# Altium PCB Four-Axis.PcbDoc
Units mm, origin at the board's own origin, x right, y up, seen from the top; angles counter-clockwise.
Board outline 49.58 x 49.58 mm, 2 copper layers (Top Layer, Bottom Layer); 70 components, 88 nets, 301 pads, 48 vias.
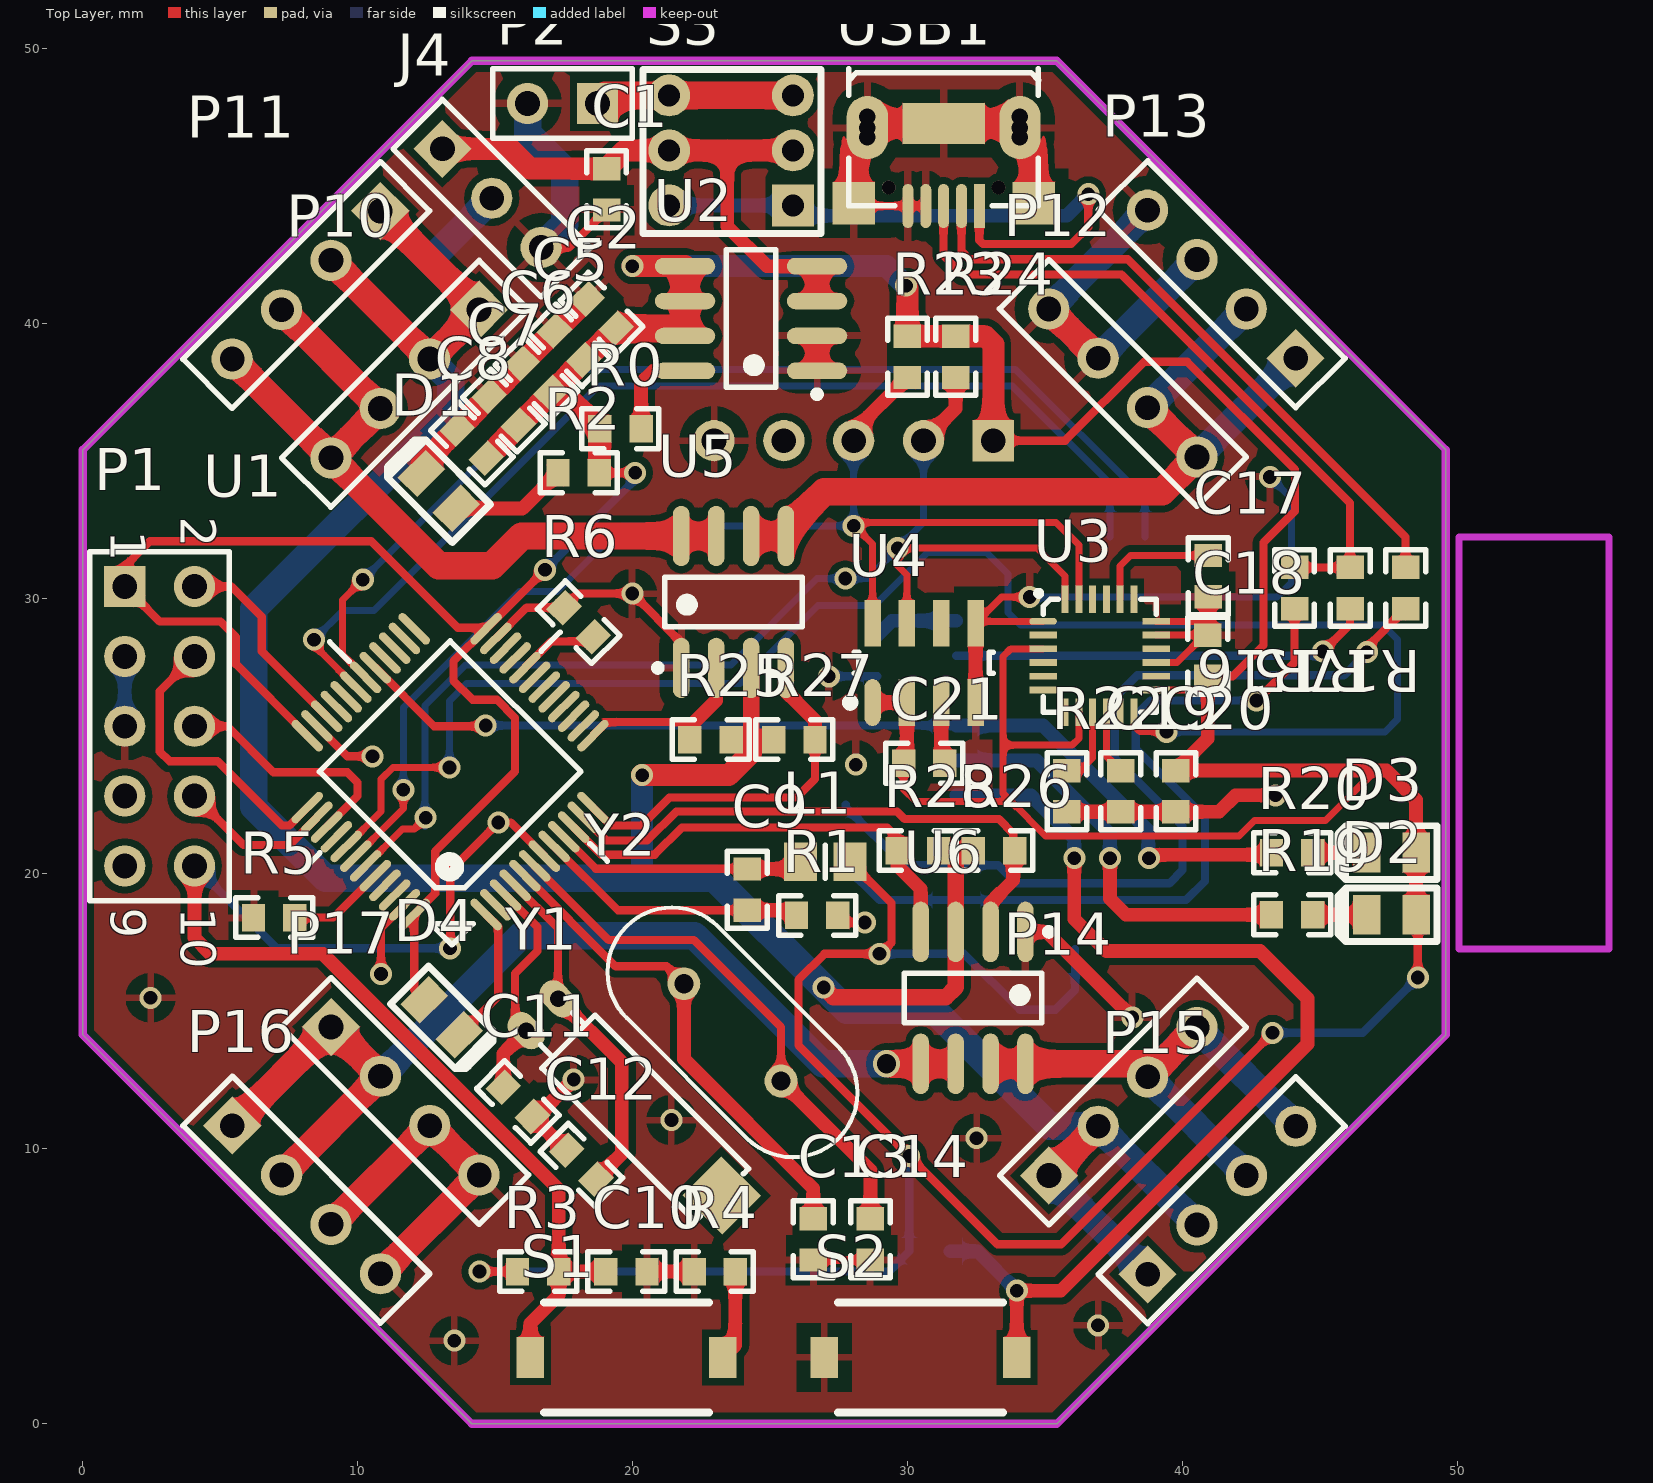
[diagram p0: Top Layer view]
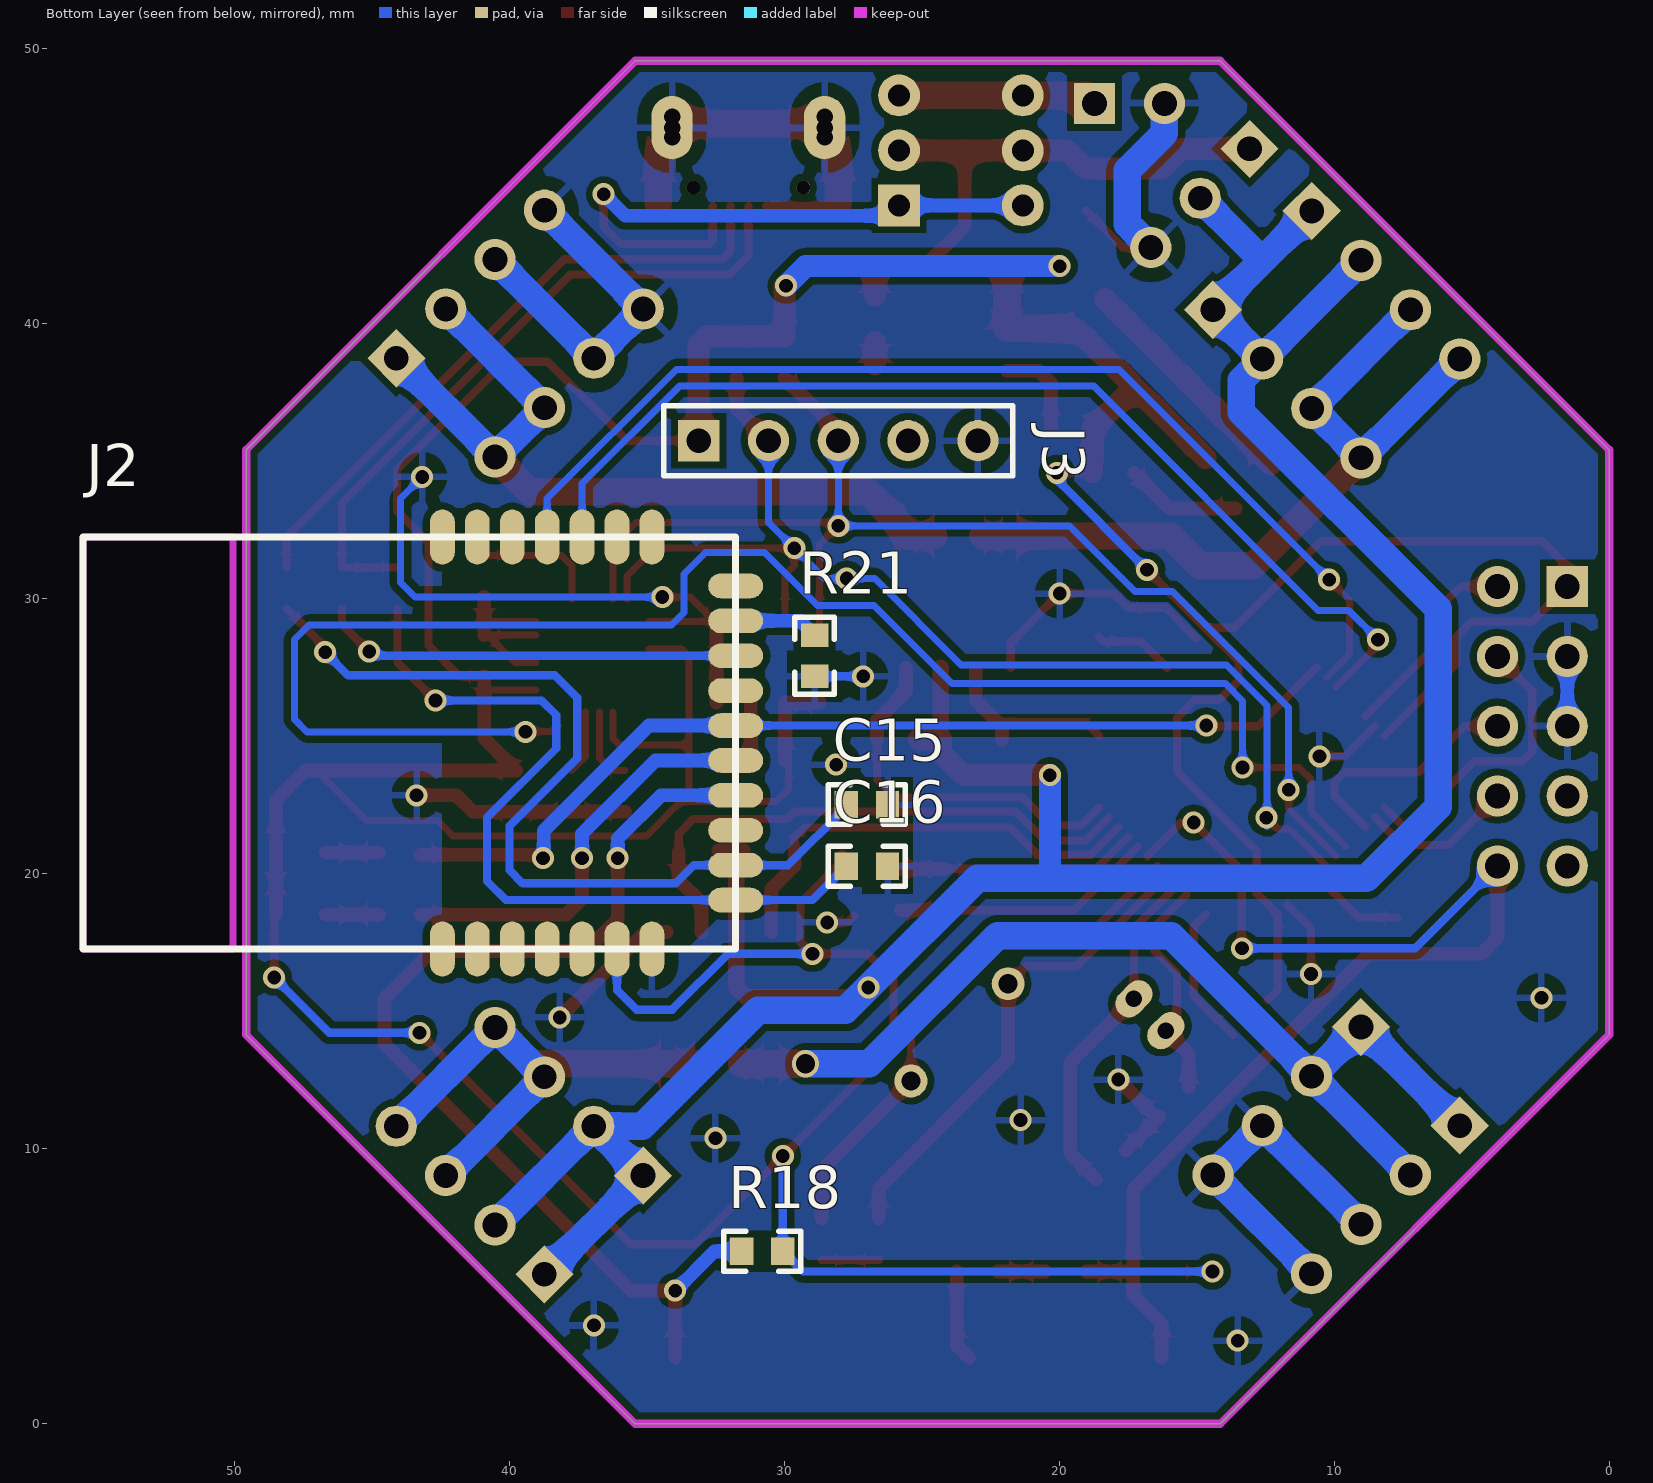
[diagram p1: Bottom Layer view, seen from below]
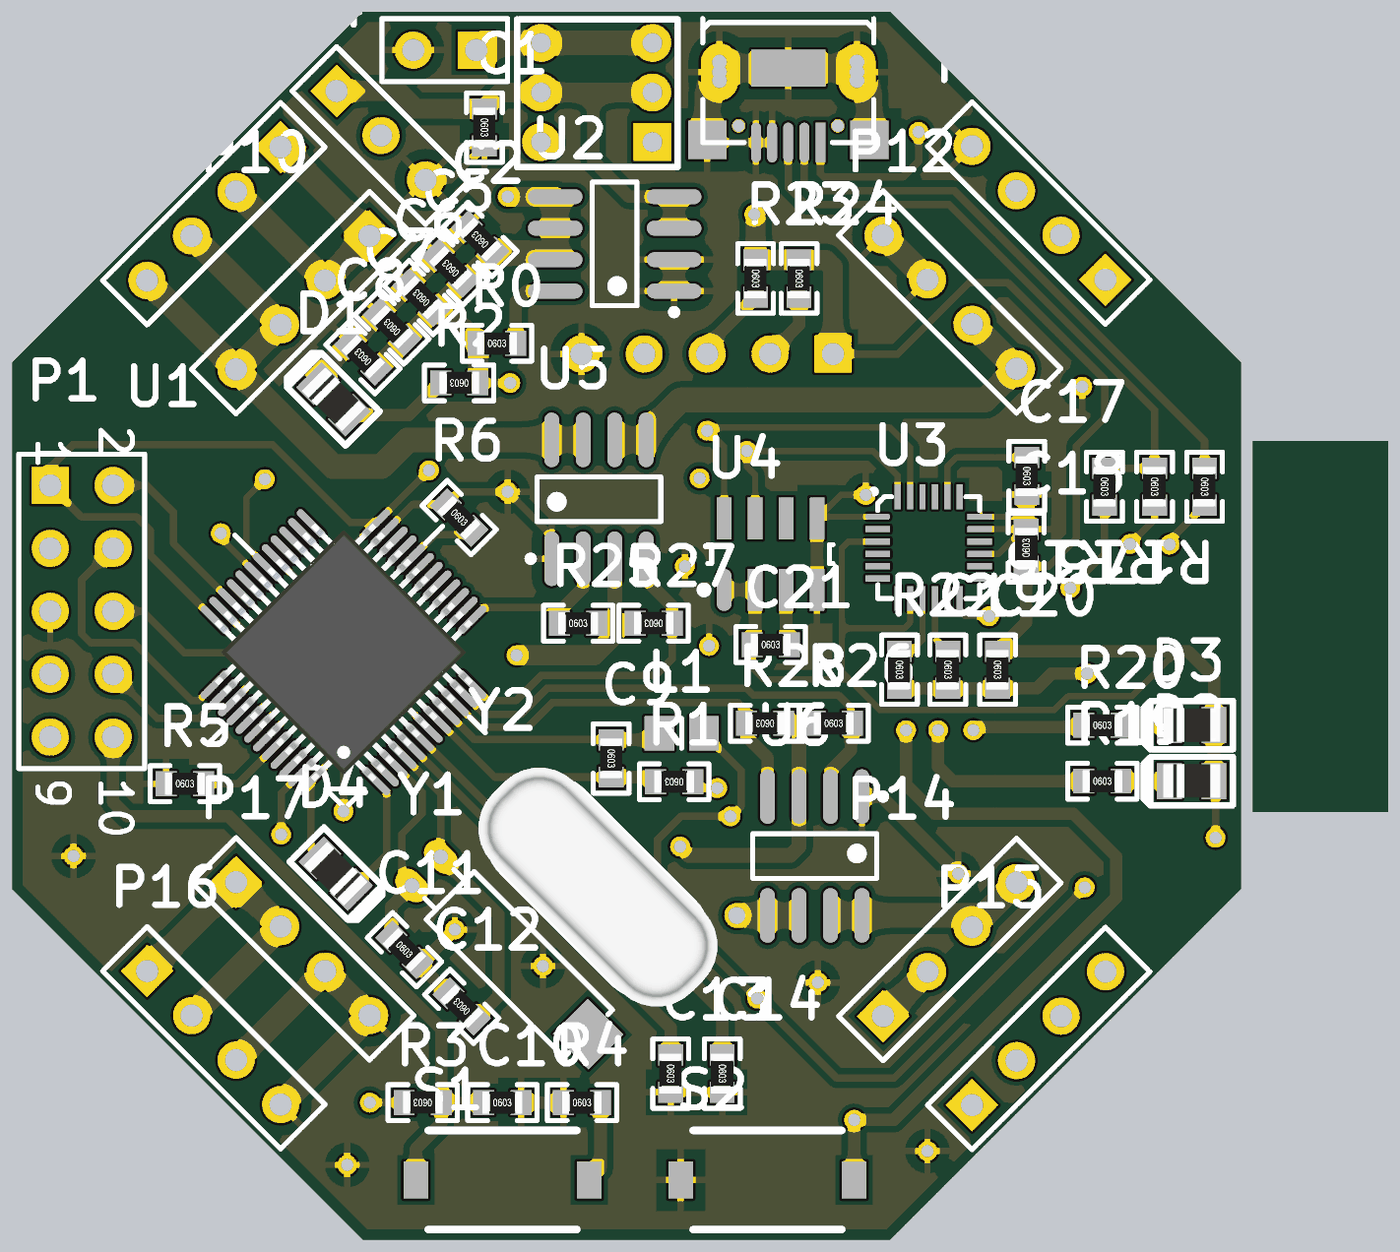
[diagram p2: 3D render of the assembled board from above, using the file's embedded part models]
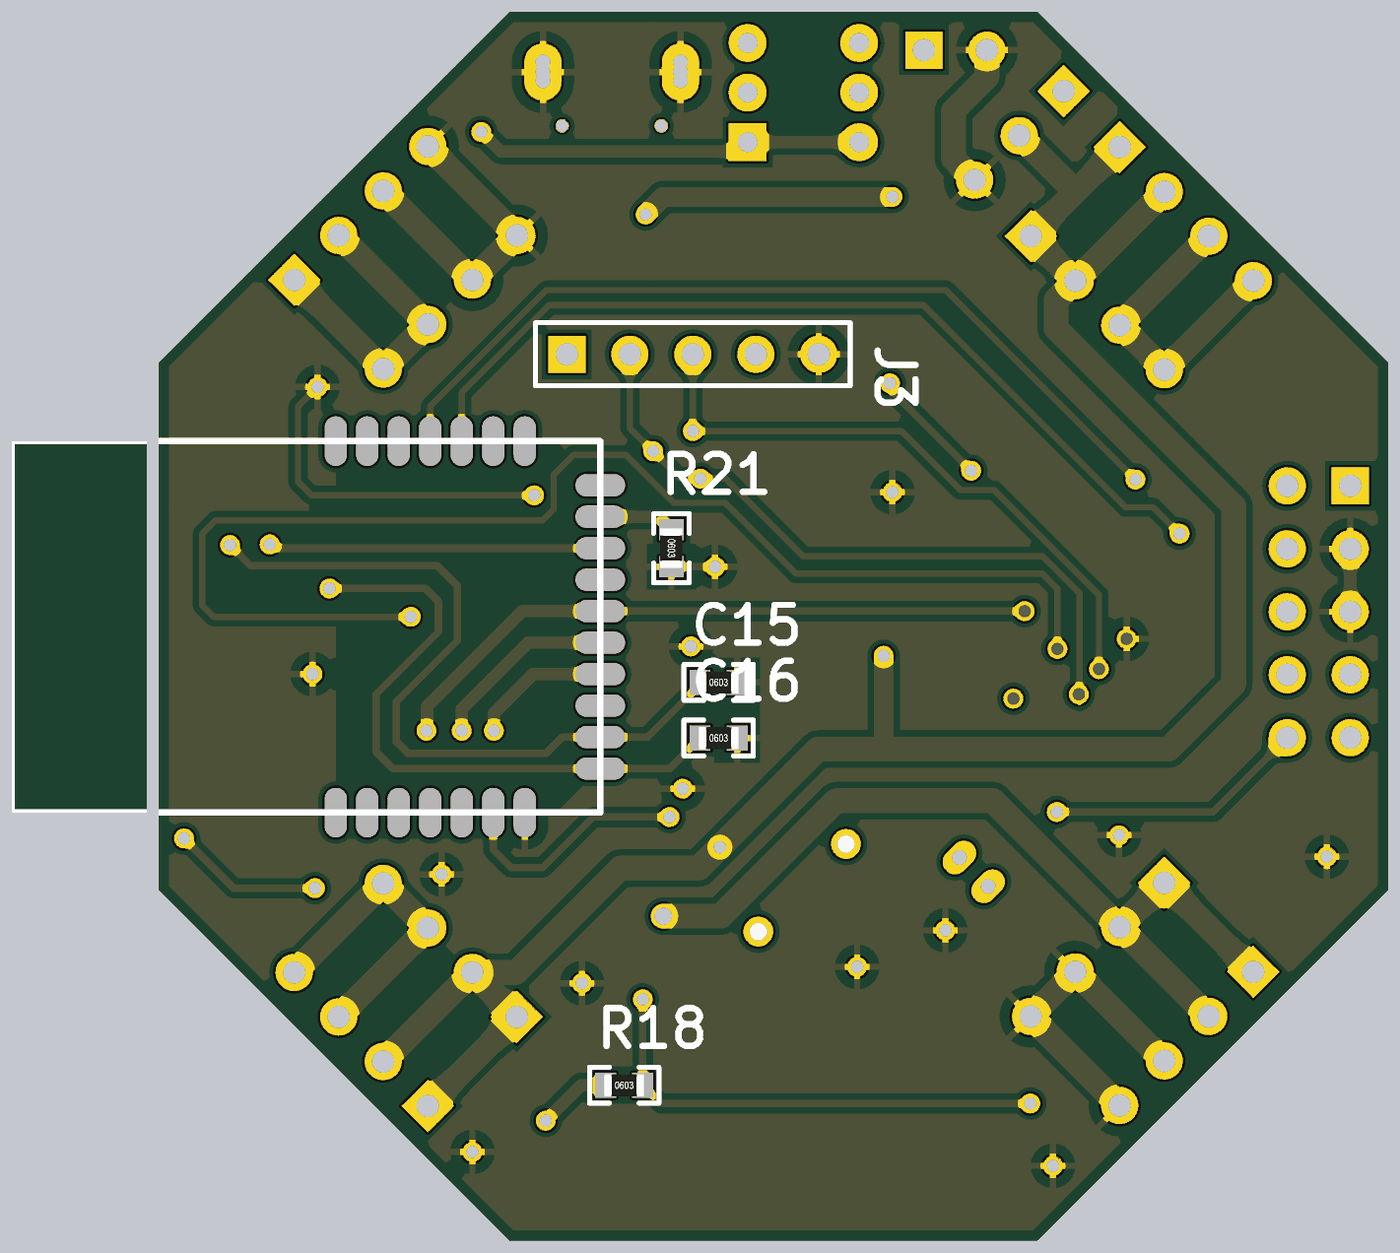
[diagram p3: 3D render of the assembled board from below, using the file's embedded part models]

## Layer stack, top to bottom
Top Solder: solder mask 0.0102, Solder Resist, Dk 3.5
Top Layer: signal copper 0.0356
Dielectric 1: dielectric 0.32, FR-4, Dk 4.8
Bottom Layer: signal copper 0.0356
Bottom Solder: solder mask 0.0102, Solder Resist, Dk 3.5

## Board outline
0,14.122 14.148,-0.025 35.433,-0.025 49.581,14.122 49.581,35.408 35.433,49.555 14.148,49.555 0,35.408

## Design rules (kind name [scope] priority, off if disabled: settings)
Clearance [All] p1: gap=0.254
PolygonConnect [All] p1: connectstyle=Relief reliefconductorwidth=0.254 reliefentries=4 polygonreliefangle="90 Angle" airgapwidth=0.5
RoutingVias [All] p1: holewidth=0.5 width=0.8 viastyle="Through Hole" minholewidth=0.3 minwidth=0.6 maxholewidth=0.711 maxwidth=1.27
SolderMaskExpansion [All] p1: expansion=0.102
UnpouredPolygon [All] p1: allowunpoured=FALSE
Width POWER [InNet('GND','VCC','VIN','3.3V','MO0+','MO0-','MO1+','MO1-','MO2+','MO2-','MO3+','MO3-','MO4+','MO4-')] p1: maxlimit=1.5 minlimit=0.254 preferedwidth=1
Width [All] p2: maxlimit=0.5 minlimit=0.254 preferedwidth=0.254
29 further rules are at their usual default settings.

## Components (designator, comment, footprint, x,y, rotation, side; value= is the part's Value field where it differs from the comment)
C1 "Cap Pol3" 0603R 19.05,44.882 r270 top
C2 "Cap Pol3" 0603R 18.872,40.361 r135 top
C5 "Cap Pol3" 0603R 17.688,39.203 r135 top
C6 "Cap Pol3" 0603R 16.502,38.017 r135 top
C7 "Cap Pol3" 0603R 15.317,36.832 r135 top
C8 "Cap Pol3" 0603R 14.149,35.63 r135 top
C9 "Cap Pol3" 0603R 24.166,19.406 r270 top
C10 "Cap Pol3" 0603R 19.774,5.512 r0 top
C11 "Cap Pol3" 0603R 15.824,11.684 r315 top
C12 "Cap Pol3" 0603R 18.136,9.398 r135 top
C13 "Cap Pol3" 0603R 26.568,6.68 r270 top
C14 "Cap Pol3" 0603R 28.651,6.68 r270 top
C15 "Cap Pol3" 0603R 27,22.502 r180 bottom
C16 "Cap Pol3" 0603R 27,20.256 r180 bottom
C17 "Cap Pol3" 0603R 40.945,30.81 r270 top
C18 "Cap Pol3" 0603R 40.919,27.915 r90 top
C19 "Cap Pol3" 0603R 37.757,22.987 r270 top
C20 "Cap Pol3" 0603R 39.764,22.987 r270 top
C21 "Cap Pol3" 0603R 30.607,24.003 r0 top
D1 "Power" 0805D 12.954,33.909 r135 top
D2 "PAIR" 0805D 47.6,18.491 r180 top
D3 "LINK" 0805D 47.6,20.752 r180 top
D4 "1N4148" 0805D 13.056,14.757 r315 top
J2 "BleMicro" BleMicro 44.602,24.74 r90 bottom locked
J3 "SRF02" HDR1X5 33.122,35.738 r180 bottom
J4 "Header 3" HDR1X3 13.081,46.355 r315 top locked
L1 "Inductor" 6-0805_N 27.011,20.422 r180 top
P1 "JTAG" HDR2X5 1.524,30.429 r270 top
P2 "电源输入" HDR1X2 18.72,48.006 r180 top locked
P10 "Header 4" HDR1X4#1 14.413,40.502 r225 top locked
P11 "Header 4" HDR1X4#1 10.82,44.094 r225 top locked
P12 "Header 4" HDR1X4#2 40.528,35.143 r135 top locked
P13 "Header 4" HDR1X4#1 44.12,38.735 r135 top locked
P14 "Header 4" HDR1X4#1 35.143,9.002 r45 top locked
P15 "Header 4" HDR1X4#1 38.735,5.41 r45 top locked
P16 "Header 4" HDR1X4#1 5.436,10.82 r315 top locked
P17 "Header 4" HDR1X4#1 9.028,14.413 r315 top locked
R0 "Res2" 0603R 19.558,36.17 r0 top
R1 "Res2" 0603R 26.711,18.466 r180 top
R2 "Res2" 0603R 18.034,34.569 r180 top
R3 "Res2" 0603R 16.561,5.512 r180 top
R4 "Res2" 0603R 22.987,5.512 r0 top
R5 "Res2" 0603R 6.96,18.39 r0 top
R6 "Res2" 0603R 18.034,29.134 r315 top
R15 "Res2" 0603R 46.101,30.378 r270 top
R16 "Res2" 0603R 44.082,30.378 r270 top
R17 "Res2" 0603R 48.12,30.378 r270 top
R18 "Res2" 0603R 30.81,6.248 r180 bottom
R19 "Res2" 0603R 43.993,18.491 r0 top
R20 "Res2" 0603R 43.993,20.752 r0 top
R21 "Res2" 0603R 28.905,27.915 r270 bottom
R22 "Res2" 0603R 35.801,22.987 r270 top
R23 "Res2" 0603R 29.997,38.786 r270 top
R24 "Res2" 0603R 31.75,38.786 r270 top
R25 "Res2" 0603R 22.835,24.867 r0 top
R26 "Res2" 0603R 33.147,20.828 r0 top
R27 "Res2" 0603R 25.883,24.867 r180 top
R28 "Res2" 0603R 30.378,20.828 r180 top
S1 "RST" SW-SOT3*6 16.281,2.388 r270 top
S2 "BOOT" SW-SOT3*6 33.975,2.388 r90 top
S3 "电源开关" 自锁开关-5.8*5.8 25.832,44.296 r180 top locked
U1 "STM32F103CBT6" LQFP48 13.36,23.698 r135 top
U2 "TPS7333-8" TPS73XX-8 24.308,40.183 r180 top
U3 "MPU9150" LCC24 36.932,27.898 r0 top
U4 "MS5611" LCC8 28.727,26.213 r90 top
U5 "SP8M4" TPS73XX-8 23.673,29.87 r90 top
U6 "SP8M4" TPS73XX-8 32.385,15.469 r270 top
USB1 "MicroUSB" MICROUSB_D2S6 31.471,46.308 r0 top locked
Y1 "32.768K" OSC_3X8d 16.129,14.275 r315 top
Y2 "8M" XTAL-HC49S 21.864,15.982 r315 top

## Footprints (in the part's own frame and the unit in brackets; to place one, negate y for a bottom-side part, rotate by r counter-clockwise, add the part's x,y. Pads: shape width x height; smd on the part's side, far side on the other; paste and mask are expansions set on the pad)
6-0805_N [mm] "Chip Resistor, Body 2.0x1.2mm, IPC Medium Density"
  rect 1.2x1.4 smd: 1(-0.9,0) 2(0.9,0)
  silkscreen extent 0,-0.6 0,0.6, body extent -1.07,-0.7 1.08,0.7, height 0.7
0603R [mm]
  rect 0.85x1 smd: 1(-0.75,0) 2(0.75,0)
  Top Layer pour cut-out: -0.33,0.495 -0.33,-0.495 0.33,-0.495 0.33,0.495
  silkscreen extent -1.4,-0.72 1.4,0.72, body extent -0.8,-0.46 0.8,0.44, height 0.5
0805D [mm]
  rect 1x1.45 smd: 1(-0.9,0) 2(0.9,0)
  Top Layer pour cut-out: -0.432,0.749 -0.432,-0.737 0.406,-0.737 0.406,0.749
  silkscreen extent -1.66,-0.98 1.94,0.98, body extent -1.16,-0.68 1.14,0.67, height 0.76
BleMicro [mm]
  oval 2x0.9 smd: 1(-7.493,-2.159) 2(-7.493,-3.429) 3(-7.493,-4.699) 4(-7.493,-5.969) 5(-7.493,-7.239) 6(-7.493,-8.509) 7(-7.493,-9.779) 18(7.493,-9.779) 19(7.493,-8.509) 20(7.493,-7.239) 21(7.493,-5.969) 22(7.493,-4.699) 23(7.493,-3.429) 24(7.493,-2.159)
  oval 0.9x2 smd: 8(-5.715,-12.827) 9(-4.445,-12.827) 10(-3.175,-12.827) 11(-1.905,-12.827) 12(-0.635,-12.827) 13(0.635,-12.827) 14(1.905,-12.827) 15(3.175,-12.827) 16(4.445,-12.827) 17(5.715,-12.827)
  Keep-Out Layer board cut-out: -7.493,10.922 -7.493,5.461 7.493,5.461 7.493,10.922
  Keep-Out Layer lines w0.254: -7.493,5.461 7.493,5.461 7.493,10.922 -7.493,10.922 -7.493,5.461
  silkscreen extent -7.49,-12.83 7.49,10.92
HDR1X2 [mm] "Connector; Header; 2 Position"
  rect 1.5x1.5 hole 0.9: 1(0,0)
  round 1.5 hole 0.9: 2(2.54,0)
  silkscreen extent -1.27,-1.27 3.81,1.27
HDR1X3 [mm] "Connector; Header; 3 Position"
  rect 1.5x1.5 hole 0.9: 1(0,0)
  round 1.5 hole 0.9: 2(2.54,0) 3(5.08,0)
  silkscreen extent -1.27,-1.27 6.35,1.27
HDR1X4#1 [mm] "Connector; Header; 4 Position"
  rect 1.5x1.5 hole 0.9: 1(0,0)
  round 1.5 hole 0.9: 2(2.54,0) 3(5.08,0) 4(7.62,0)
  silkscreen extent -1.27,-1.27 8.89,1.27
HDR1X4#2 [mm] "Connector; Header; 4 Position"
  round 1.5 hole 0.9: 1(0,0) 2(2.54,0) 3(5.08,0) 4(7.62,0)
  silkscreen extent -1.27,-1.27 8.89,1.27
HDR1X5 [mm] "Connector; Header; 5 Position"
  rect 1.5x1.5 hole 0.9: 1(0,0)
  round 1.5 hole 0.9: 2(2.54,0) 3(5.08,0) 4(7.62,0) 5(10.16,0)
  silkscreen extent -1.27,-1.27 11.43,1.27
HDR2X5 [mm] "Connector; Header; 5x2 Position"
  rect 1.5x1.5 hole 0.9: 1(0,0)
  round 1.5 hole 0.9: 2(0,2.54) 3(2.54,0) 4(2.54,2.54) 5(5.08,0) 6(5.08,2.54) 7(7.62,0) 8(7.62,2.54) 9(10.16,0) 10(10.16,2.54)
  silkscreen extent -1.27,-1.27 11.43,3.81
LCC8 [mm]
  oval 1.7x0.6 smd: 1(0,0)
  rect 1.7x0.6 smd: 2(0,-1.25) 3(0,-2.5) 4(0,-3.75) 5(2.886,-3.75) 6(2.886,-2.5) 7(2.886,-1.25) 8(2.886,0)
  Top Layer pour cut-out: 0,0.381 0,-4.064 2.921,-4.064 2.921,0.381
  silkscreen extent -0.15,-4.39 1.83,0.96
LCC24 [mm]
  oval 1x0.25 smd: 1(-2.001,1.27)
  rect 1x0.25 smd: 2(-2.001,0.77) 3(-2.001,0.27) 4(-2.001,-0.23) 5(-2.001,-0.73) 6(-2.001,-1.23) 13(2.109,-1.23) 14(2.109,-0.73) 15(2.109,-0.23) 16(2.109,0.27) 17(2.109,0.77) 18(2.109,1.27)
  rect 0.25x1 smd: 7(-1.196,-2.035) 8(-0.696,-2.035) 9(-0.196,-2.035) 10(0.304,-2.035) 11(0.804,-2.035) 12(1.304,-2.035) 19(1.304,2.075) 20(0.804,2.075) 21(0.304,2.075) 22(-0.196,2.075) 23(-0.696,2.075) 24(-1.196,2.075)
  Top Layer pour cut-out: -1.446,2.075 -2.001,1.52 -2.001,-1.48 -1.446,-2.035 -1.446,-2.035 1.554,-2.035 2.109,-1.48 2.109,1.52 1.554,2.075
  silkscreen extent -2.26,-2.03 2.11,2.39
LQFP48 [mm]
  oval 1.5x0.3 smd: 1(-4.6,2.75) 2(-4.6,2.25) 3(-4.6,1.75) 4(-4.6,1.25) 5(-4.6,0.75) 6(-4.6,0.25) 7(-4.6,-0.25) 8(-4.6,-0.75) 9(-4.6,-1.25) 10(-4.6,-1.75) 11(-4.6,-2.25) 12(-4.6,-2.75) 25(4.6,-2.75) 26(4.6,-2.25) 27(4.6,-1.75) 28(4.6,-1.25) 29(4.6,-0.75) 30(4.6,-0.25) 31(4.6,0.25) 32(4.6,0.75) 33(4.6,1.25) 34(4.6,1.75) 35(4.6,2.25) 36(4.6,2.75)
  oval 0.3x1.5 smd: 13(-2.75,-4.6) 14(-2.25,-4.6) 15(-1.75,-4.6) 16(-1.25,-4.6) 17(-0.75,-4.6) 18(-0.25,-4.6) 19(0.25,-4.6) 20(0.75,-4.6) 21(1.25,-4.6) 22(1.75,-4.6) 23(2.25,-4.6) 24(2.75,-4.6) 37(2.75,4.6) 38(2.25,4.6) 39(1.75,4.6) 40(1.25,4.6) 41(0.75,4.6) 42(0.25,4.6) 43(-0.25,4.6) 44(-0.75,4.6) 45(-1.25,4.6) 46(-1.75,4.6) 47(-2.25,4.6) 48(-2.75,4.6)
  silkscreen extent -6.35,-6.42 6.44,6.42, body extent -4.53,-4.51 4.5,4.51, height 1.75
MICROUSB_D2S6 [mm]
  round 0.5 hole 0.5: 0(-2.157,-1.357) 0(1.843,-1.357)
  rect 0.4x1.6 smd: 1(1.143,-2.032)
  oval 0.4x1.6 smd: 2(0.493,-2.032) 3(-0.157,-2.032) 4(-0.807,-2.032) 5(-1.457,-2.032)
  rect 1.55x1.55 smd: 6(-3.429,-1.929) 6(3.124,-1.929)
  round 0.8 hole 0.6: 6(-2.932,0.468) 6(-2.932,1.218) 6(2.618,0.468) 6(2.618,1.218)
  oval 1.5x2.3 hole 0.6: 6(-2.932,0.818) 6(2.618,0.818)
  rect 3x1.5 smd: 6(-0.157,0.968)
  silkscreen extent -3.61,-2.03 3.29,2.97
OSC_3X8d [mm]
  oval 1.5x1 hole 0.6: 1(0,0) 2(0,1.64)
  rect 2.032x2 smd: 3(9.271,0.787)
  silkscreen extent 0.74,-0.56 9.27,2.17
SW-SOT3*6 [mm]
  rect 1.5x1 smd: 1(0,0) 2(0,7)
  silkscreen extent -2,0.5 2,6.5
TPS73XX-8 [mm] "SOIC, 8-Leads, Body 4.9x3.9mm, Pitch 1.27mm, IPC Medium Density"
  oval 2.2x0.6 smd: 1(-2.4,1.905) 2(-2.4,0.635) 3(-2.4,-0.635) 4(-2.4,-1.905) 5(2.4,-1.905) 6(2.4,-0.635) 7(2.4,0.635) 8(2.4,1.905)
  silkscreen extent -2.53,-2.5 0.9,2.88, body extent -2,-2.5 2,2.5, height 1.75
XTAL-HC49S [mm]
  round 1.2 hole 0.7: 1(0,0) 2(5,0)
  silkscreen extent -2.95,-2.35 7.95,2.35, body extent -3.18,-2.32 8.18,2.33, height 3.5
自锁开关-5.8*5.8 [mm]
  rect 1.524x1.524 hole 0.8: 1(0,0)
  round 1.524 hole 0.8: 2(0,-2) 3(0,-4) 4(4.5,-4) 5(4.5,-2) 6(4.5,0)
  silkscreen extent -1.02,-4.95 5.46,1.02

## Part data
C1 C2 C5 C6 C7 C8 C9 C10 C11 C12 C13 C14 C15 C16 C17 C18 C19 C20 C21: "Polarized Capacitor (Surface Mount)"
D1 D2 D3: library part LED2, "Typical RED, GREEN, YELLOW, AMBER GaAs LED"
D4: library part Diode, "Default Diode"
J4: "Header, 3-Pin"
P1: library part "Header 5X2", "Header, 5-Pin, Dual row"
P2: library part "Header 2", "USART"
P10 P11 P12 P13 P14 P15 P16 P17: "Header, 4-Pin"
R0 R1 R2 R3 R4 R5 R6 R15 R16 R17 R18 R19 R20 R21 R22 R23 R24 R25 R26 R27 R28: "Resistor"
S1 S2: library part SW-PB, "Switch"
S3: library part 自锁开关
U1: library part STM32F103C8T6, "LQFP48"
U2: library part TPS73XX-8
USB1: library part USB, "USB"
Y1 Y2: library part J晶振-3

## Via types
v1: diameter 0.8, hole 0.5, Top Layer to Bottom Layer, 47 vias
v2: diameter 1, hole 0.7, Top Layer to Bottom Layer, 1 vias

## Nets (pads, with @x,y where several pads share a name; then routed paths per layer and width w, separated by ;. In a path a pad name is that pad's centre, name@x,y a point inside that pad or via, vN(x,y) a via of type N, cw(c..) or ccw(c..) an arc to the next point about the centre after c; other vN are vias at no path point)
3.3V: C2.1 C5.1 C6.1 C7.1 C8.1 C18.1 C20.1 C21.1 D2.1 D3.1 D4.1 J2.6 J3.1 L1.1 P1.1 R0.1 R2.1 R3.2 R18.2 R23.1 R24.1 U1.24 U1.36 U1.48 U2.5 U2.6 U2.7 U3.3 U3.8 U3.13 U4.1 U4.2 | length 235.1
  Top Layer w0.254: C21.1 29.857,23.051 30.302,22.606 33.782,22.606 ; U3.3 33.757,28.168 33.477,27.888 33.477,24.663 ; U3.8 36.236,24.907 35.992,24.663 33.477,24.663 ; U3.13 40.892,26.668 ; 47.015,23.737 45.199,21.92 42.621,21.92 42.062,21.361 35.027,21.361 33.782,22.606 ; 33.477,24.663 33.477,22.911 33.782,22.606
  Top Layer w0.3: U1.36 5.563,27.607 5.563,28.6 5.004,29.159 2.794,29.159 P1.1 1.524,31.166 2.438,32.08 10.49,32.08 13.637,28.934 U1.24@14.63,28.934 ; D4.1 12.052,15.761 U1.48 12.816,19.264 12.816,20.797 15.723,23.704 15.723,25.654 15.062,26.314 14.173,26.314 13.487,27 13.487,27.714 U1.24 v1(16.812,31.039) ; v1(14.427,5.512) R3.2 ; R2.1@18.771,34.556 R2.1 v1(20.091,34.569) ; L1.1 29.413,18.92 29.413,17.475 v1@28.994,17.056 ; v1(28.981,17.069) 26.975,17.069 26.035,16.129 26.035,13.74 v1(30.06,9.715) 33.273,6.502 35.585,6.502 v1(43.282,14.199) ; J3.1 35.738,35.738 38.608,38.608 40.177,38.608 44.094,34.69 44.094,33.172 42.951,32.029 42.951,28.296 41.82,27.165 C18.1 ; D2.1 48.565,18.426 v1(48.565,16.205)
  Top Layer w0.5: L1.1 L1.1@27.911,20.598 ; U4.1 U4.2 C21.1@29.977,24.123 ; C18.1 40.919,24.893 C20.1 39.765,23.739 47.014,23.739 47.015,23.737 47.434,23.737 48.5,22.671 D3.1 D2.1
  Top Layer w0.8: C8.1@14.679,35.107 C2.1@19.349,39.776 ; C6.1@17.491,37.487 R0.1 R2.1@18.808,34.593 ; v1(19.99,42.088) U2.5 ; v1(29.947,41.377) 29.997,41.326 R23.1 R24.1 32.829,39.536 33.122,39.243 J3.1
  Top Layer w1: C2.1@19.655,39.822 21.908,39.822 U2.6 U2.5@21.908,41.808
  Bottom Layer w0.3: v1(14.427,5.512) 29.324,5.512 R18.2 v1(30.06,9.715) ; v1(16.812,31.039) 20.091,34.318 v1(20.091,34.569) ; v1(28.981,17.069) 32.055,17.069 34.087,15.037 35.382,15.037 36.093,15.748 J2.6 ; v1(43.282,14.199) 46.558,14.199 v1(48.565,16.205)
  Bottom Layer w0.8: v1(19.99,42.088) 29.235,42.088 v1(29.947,41.377)
5V_USB: S3.1 S3.6 USB1.1 | length 22.7
  Top Layer w0.3: USB1.1 32.614,43.028 32.75,42.891 35.957,42.891 36.576,43.51 v1(36.576,44.704)
  Bottom Layer w0.5: S3.6 S3.1 25.832,43.917 35.789,43.917 v1(36.576,44.704)
A0: R28.2 U1.10 U6.4 | length 16.5
  Top Layer w0.3: U1.10 18.858,20.676 20.803,20.676 21.793,21.666 29.261,21.666 29.628,21.299 R28.2
  Top Layer w0.5: R28.2 29.628,20.283 30.48,19.431 U6.4
A1: R26.2 U1.11 U6.2 | length 20.7
  Top Layer w0.3: U1.11 19.05,21.191 20.53,21.191 21.59,22.25 29.616,22.25 29.896,21.971 33.325,21.971 33.846,21.45 R26.2@33.846,20.776
  Top Layer w0.5: U6.2 33.02,18.923 33.846,19.748 R26.2@33.846,20.776
A2: R27.1 U1.12 U5.4 | length 13.5
  Top Layer w0.3: U1.12 19.205,21.742 20.32,21.742 21.334,22.756 25.956,22.756 26.633,23.432 R27.1
  Top Layer w0.5: U5.4 25.578,26.619 26.633,25.564 R27.1
A3: R25.1 U1.13 U5.2 | length 6.7
  Top Layer w0.3: U1.13 19.053,25.502 22.25,25.502
  Top Layer w0.5: R25.1 R25.1@22.085,25.336 ; 22.25,25.502 23.038,26.289 U5.2
A4: U1.14
A5: U1.15
A6: U1.16
A7: U1.17
A11: U1.32
A12: U1.33
A13: P1.2 U1.34 | length 7.5
  Top Layer w0.3: P1.2 5.41,30.429 6.51,29.33 6.51,28.074 U1.34
A14: P1.4 U1.37 | length 10.7
  Top Layer w0.3: P1.4 2.794,26.619 2.794,24.435 3.15,24.079 4.902,24.079 7.239,21.742 7.516,21.742 U1.37
A15: P1.8 U1.38 | length 5.6
  Top Layer w0.3: P1.8 5.842,21.031 7.511,21.031 U1.38
B1: U1.19
B3: P1.6 U1.39 | length 8.9
  Top Layer w0.3: P1.6 5.258,25.349 6.934,23.673 9.627,23.673 9.995,23.304 9.995,22.808 U1.39
B4: U1.40
B8: U1.45
B9: U1.46
B10: U1.21
B11: U1.22
B12: U1.25
B13: U1.26
B14: U1.27
B15: U1.28
BLEP0.0: J2.23
BLEP0.1: J2.22
BLEP0.4: J2.19
BLEP0.5: J2.18
BLEP0.6: J2.17
BLEP0.7: J2.16 R21.1 | length 3.1
  Bottom Layer w0.5: R21.1 29.425,29.185 J2.16
BLEP1.0: J2.15 R15.2 | length 15.4
  Top Layer w0.3: v1(45.11,28.067) 46.101,29.058 R15.2
  Bottom Layer w0.3: J2.15 44.958,27.915 v1(45.11,28.067)
BLEP1.1: J2.14
BLEP1.2: J2.13 R20.1 U1.29 | length 35.9
  Top Layer w0.3: U1.29 12.77,25.349 14.63,25.349 v1(14.656,25.375)
  Top Layer w0.5: v1@38.786,20.676 R20.1@43.243,20.676
  Bottom Layer w0.3: v1(14.656,25.375) J2.13
  Bottom Layer w0.5: J2.13 34.925,25.375 38.76,21.539 v1@38.76,20.676
  other v1: 38.786,20.549
BLEP1.3: J2.12 R19.1 | length 15.2
  Top Layer w0.5: v1@37.363,20.676 37.363,19.075 37.948,18.491 R19.1
  Bottom Layer w0.5: J2.12 34.696,24.105 37.363,21.438 v1@37.363,20.676
  other v1: 37.363,20.549
BLEP1.4: J2.11 R18.1 S2.1 | length 38.9
  Top Layer w0.5: S2.1 v1(33.975,4.816) 35.575,4.816 44.552,13.792 44.552,15.443 42.824,17.17 37.236,17.17 36.068,18.339 v1(36.068,20.549)
  Bottom Layer w0.5: R18.1 32.542,6.248 v1(33.975,4.816) ; J2.11 34.493,22.835 36.068,21.26 v1(36.068,20.549)
BLEP1.5: J2.10
BLEP1.6: J2.5
BLEP1.7: J2.4
BLEP2.0: J2.3
BLEP2.1: J2.2
BLEP2.2: J2.1
BLERST: J2.24
BLERX: J2.21 U1.30 | length 39.2
  Top Layer w0.254: v1(10.185,30.683) 9.447,29.945 9.447,27.965 U1.30
  Bottom Layer w0.254: v1(10.185,30.683) 17.831,38.329 33.934,38.329 38.633,33.63 J2.21
BLESCL(D+): C16.1 J2.8 R16.2 | length 29.5
  Top Layer w0.3: v1(42.697,26.289) 44.082,27.673 R16.2
  Bottom Layer w0.3: C16.1 28.982,19.025 J2.8 40.132,19.025 40.818,19.71 40.818,22.022 38.303,24.536 38.303,25.756 38.837,26.289 v1(42.697,26.289)
BLESDA(D-): C15.1 J2.9 R17.2 | length 33
  Top Layer w0.3: v1(46.711,28.042) 46.711,28.219 R17.2
  Bottom Layer w0.3: C15.1 27.75,22.415 29.87,20.295 J2.9 33.299,20.295 33.96,19.634 39.522,19.634 40.005,20.117 40.005,21.717 37.541,24.181 37.541,26.391 38.354,27.203 45.872,27.203 v1(46.711,28.042)
BLETX: J2.20 U1.31 | length 38.5
  Top Layer w0.254: v1(8.407,28.499) 8.407,28.298 U1.31
  Bottom Layer w0.254: v1(8.407,28.499) 9.474,29.566 10.592,29.566 18.745,37.719 33.826,37.719 37.363,34.181 J2.20
BOOT0: R5.2 U1.44 | length 3.6
  Top Layer w0.3: R5.2 9.112,18.39 U1.44
BOOT1: R6.2 U1.20 | length 2.9
  Top Layer w0.3: U1.20 17.034,28.432 18.393,28.432 R6.2
BUZZER: U1.18
C13: U1.2
GND: C1.2 C2.2 C5.2 C6.2 C7.2 C8.2 C10.2 C11.2 C12.2 C13.2 C14.2 C15.2 C16.2 C17.2 C18.2 C19.2 C20.2 D1.2 J2.7 J3.5 J4.3 P1.3 P1.5 P2.2 P12.3 P12.4 P13.3 P13.4 P16.3 P16.4 P17.3 P17.4 R1.1 R4.1 R5.1 R6.1 R21.2 R22.2 S2.2 U1.23 U1.35 U1.47 U2.1 U2.2 U3.1 U3.15 U3.17 U3.18 U4.4 U4.5 U5.1 U6.1 USB1.4 USB1.5 USB1.6 | length 143.9
  Top Layer w0.254: U4.5 U4.5@32.546,29.168 ; v1(34.442,30.048) 33.427,30.048 U4.5@32.546,29.168 ; U3.1 U4.5@32.546,29.168 ; U3.15 39.802,27.668 40.799,28.665 C18.2 ; U3.17 C18.2@40.916,28.668 ; U3.18 40.877,29.168
  Top Layer w0.3: U1.35 9.62,24.257 v1(10.541,24.257) v1@10.541,24.46 ; v1(10.846,16.332) 10.846,18.002 U1.47 ; U1.23 16.144,29.664 R6.1 18.015,30.175 v1(19.99,30.175) 21.768,28.397 U5.1 ; J4.3 17.681,42.763 C1.2 ; C13.2 C14.2 ; R1.1 27.715,18.212 v1(28.448,18.212) ; USB1.6@28.042,44.379 28.145,44.276 USB1.5 USB1.4
  Top Layer w0.5: C12.2 17.58,9.928 C11.2 16.513,11.154 v1(17.856,12.497) ; C10.2 R4.1 ; U4.4 U4.5 ; U6.1 35.065,17.869 v1(38.176,14.757) ; R22.2 C19.2 C20.2 41.338,22.237 41.935,22.835 v1(43.383,22.835) ; C18.2 40.919,30.035 C17.2
  Top Layer w0.8: D1.2@12.318,34.867 C2.2 ; U2.1@26.708,38.506 U2.2@26.708,39.319
  Top Layer w1: P16.3 P17.3 P17.4 P16.4 ; USB1.6@28.042,44.379 28.042,46.279 28.539,46.776 29.039,47.276 31.314,47.276 33.589,47.276 34.089,46.776 34.595,46.27 USB1.6@34.595,44.379 ; P12.4 P12.3
  Bottom Layer w0.254: v1(34.442,30.048) 43.434,30.048 43.967,30.582 43.967,33.63 v1(43.18,34.417)
  Bottom Layer w0.3: v1(27.139,27.165) R21.2
  Bottom Layer w0.5: P1.5 P1.3 ; USB1.6@28.548,46.776 USB1.6@29.048,47.276 ; USB1.6@33.598,47.276 USB1.6@34.098,46.776
  Bottom Layer w1: P16.3 P17.3 P17.4 P16.4 ; P2.2 16.18,46.914 17.526,45.568 17.526,43.616 J4.3 ; P13.4 P12.4 P12.3 P13.3
  other v1: 13.513,2.997 36.932,3.556 32.512,10.363 21.412,11.024 2.464,15.469 28.118,23.952
MO0+: P16.1 P16.2 P17.1 P17.2 U6.5 U6.6 | length 49.8
  Top Layer w1: P16.1 P17.1 P17.2 P16.2 ; v2@29.375,13.069 U6.5 ; U6.5@30.759,13.069 U6.6@31.547,13.069
  Bottom Layer w1: P16.1 P17.1 P17.2 ; P16.2 P17.2 ; v2(29.235,13.069) 26.911,13.069 22.25,17.729 15.937,17.729 P17.2
MO1+: J4.2 P10.1 P10.2 P11.1 P11.2 P14.1 P14.2 P15.1 P15.2 R25.2 R26.1 R27.2 R28.1 U5.3 U6.3 | length 124.3
  Top Layer w0.5: R28.1@31.484,20.828 R26.1
  Top Layer w0.6: 24.308,24.867 U5.3 ; v1(26.949,15.85) 27.305,15.494 31.394,15.494 31.75,15.85 U6.3 31.75,20.752
  Top Layer w0.8: v1(20.345,23.571) 23.495,23.571 24.308,24.384 24.308,24.867 R27.2
  Top Layer w1: P11.2 P10.2 P10.1 P11.1 ; P14.1 P14.2
  Bottom Layer w0.8: 20.345,19.812 v1(20.345,23.571)
  Bottom Layer w1: P11.2 P10.2 ; P11.1 P10.1 P10.2 ; 12.636,42.318 J4.2 ; P15.1 P14.1 ; P15.2 P14.2 ; P10.2 13.386,37.937 13.386,36.779 6.223,29.616 6.223,22.428 8.839,19.812 22.987,19.812 v1(26.949,15.85) 27.788,15.011 30.963,15.011 35.176,10.798 P14.2 ; P14.1 P14.2 ; P14.1 P14.2
MO1-: P14.3 P14.4 P15.3 P15.4 U6.7 U6.8 | length 20.5
  Top Layer w1: U6.7@33.249,13.069 U6.8 39.209,13.069 P14.4
  Bottom Layer w1: P15.3 P14.3 P14.4 P15.4
MO2+: P12.1 P12.2 P13.1 P13.2 U5.5 U5.6 | length 32.5
  Top Layer w1: U5.6@24.562,32.27 U5.5 25.578,32.487 26.975,33.884 39.268,33.884 P12.1 P12.2
  Bottom Layer w1: P13.2 P12.2 P12.1 P13.1
MO3-: P10.3 P10.4 P11.3 P11.4 U5.7 U5.8 | length 41
  Top Layer w1: P11.4 P10.4 ; P11.3 P10.3 P10.4 ; U5.8 15.964,32.27 14.884,31.191 12.947,31.191 P10.4 ; U5.8@21.996,32.27 U5.7@22.784,32.27
  Bottom Layer w1: P11.4 P10.4 P10.3 P11.3
MPU_AD0: R22.1 U3.9 | length 2.8
  Top Layer w0.254: R22.1 36.285,23.737 36.736,24.188 U3.9
MPU_CLKOUT: U3.22
MPU_ES_CL: U3.7
MPU_ES_DA: U3.6
MPU_FSYNC: U3.11
MPU_INT: U1.41 U3.12 | length 59.7
  Top Layer w0.254: U1.41 10.849,22.247 10.849,23.422 11.278,23.851 v1(13.335,23.851) ; U3.12@38.242,25.377 38.456,25.163 39.404,25.163 v1(39.421,25.146)
  Bottom Layer w0.254: v1(13.335,23.851) 13.335,26.275 13.959,26.899 23.901,26.899 26.746,29.743 28.804,29.743 30.734,31.674 32.868,31.674 33.655,30.886 33.655,29.489 34.112,29.032 47.295,29.032 47.828,28.499 47.828,25.603 47.371,25.146 v1(39.421,25.146)
MPU_SCL: J3.3 R23.2 U1.42 U3.23 U4.8 | length 46.1
  Top Layer w0.254: U1.42 11.659,22.35 v1(11.659,23.038) ; U4.8 28.727,31.979 27.94,32.766 35.408,32.766 36.236,31.938 U3.23
  Top Layer w0.5: J3.3 28.042,36.08 R23.2
  Bottom Layer w0.254: v1(11.659,23.038) 11.659,26.035 15.881,30.258 17.253,30.258 19.634,32.639 v1(28.042,32.639) J3.3
MPU_SDA: J3.2 R24.2 U1.43 U3.24 U4.7 | length 44.5
  Top Layer w0.254: U1.43 11.631,21.615 12.065,21.615 v1(12.471,22.022) ; U4.7 29.977,30.856 29.642,31.191 v1(29.642,31.826) 34.714,31.826 35.728,30.812 ; 35.732,30.816 35.736,30.812 U3.24
  Top Layer w0.5: J3.2 31.75,36.906 R24.2
  Bottom Layer w0.254: v1(12.471,22.022) 12.471,21.742 12.44,21.711 12.44,26.098 13.926,27.584 23.571,27.584 26.708,30.721 v1(27.737,30.721) 28.537,30.721 30.582,32.766 J3.2
MPU_SDO: U4.6
NetC11_1: C11.1 U1.3 Y1.1 | length 8.3
  Top Layer w0.3: U1.3 16.535,18.048 16.535,17.17 15.723,16.358 15.723,14.681 Y1.1
  Top Layer w0.5: C11.1 15.294,13.44 Y1.1
NetC12_1: C12.1 U1.4 Y1.2 | length 12.7
  Top Layer w0.3: U1.4 17.289,18.002 Y1.2
  Top Layer w0.5: Y1.2 19.609,13.114 19.609,9.811 C12.1
NetC13_1: C13.1 U1.5 Y2.1 | length 17.9
  Top Layer w0.3: U1.5 19.383,16.615 21.231,16.615 Y2.1
  Top Layer w0.5: Y2.1 21.864,13.238 26.568,8.534 C13.1
NetC14_1: C14.1 U1.6 Y2.2 | length 19.7
  Top Layer w0.3: U1.6 19.128,17.577 22.225,17.577 25.4,14.402 Y2.2
  Top Layer w0.5: Y2.2 28.651,9.195 C14.1
NetC17_1: C17.1 U3.20 | length 4.6
  Top Layer w0.254: U3.20 37.736,31.182 38.113,31.56 C17.1
NetC19_1: C19.1 U3.10 | length 2.3
  Top Layer w0.254: U3.10 37.236,24.259 C19.1
NetC21_2: C21.2 U4.3 | length 2.3
  Top Layer w0.5: U4.3 31.227,24.133 C21.2
NetD1_1: D1.1 R2.2 | length 4.2
  Top Layer w0.5: D1.1 15.546,33.273 15.548,33.274 15.989,33.274 R2.2
NetD2_2: D2.2 R19.2 | length 2
  Top Layer w0.5: R19.2 D2.2
NetD3_2: D3.2 R20.2 | length 2
  Top Layer w0.5: R20.2 D3.2
NetR0_2: R0.2 U2.8 | length 3.4
  Top Layer w0.5: R0.2 20.308,37.834 20.752,38.278 U2.8
NetR4_2: R4.2 S1.2 | length 3.4
  Top Layer w0.5: S1.2@23.343,2.449 S1.2 23.737,2.843 R4.2
NetR15_1: R15.1 R16.1 USB1.3 | length 24.7
  Top Layer w0.3: USB1.3 31.314,42.473 32.004,41.783 37.785,41.783 46.101,33.467 R15.1 R16.1
NetR17_1: R17.1 USB1.2 | length 23.2
  Top Layer w0.3: USB1.2 31.964,42.636 32.263,42.337 38.015,42.337 48.12,32.231 R17.1
NRST: C10.1 P1.10 R3.1 S1.1 U1.7 | length 45.9
  Top Layer w0.3: v1@13.37,17.339 13.37,20.101 14.732,21.463 v1(15.113,21.844) 15.568,21.844 U1.7
  Top Layer w0.5: P1.10 4.064,17.653 4.648,17.069 8.738,17.069 17.311,8.496 R3.1 ; S1.1 16.281,3.632 17.311,4.662 R3.1 ; C10.1 R3.1
  Bottom Layer w0.3: P1.10 7.061,17.272 v1(13.36,17.272)
SFR_MODE: J3.4
VBAT: D4.2 U1.1 | length 5.2
  Top Layer w0.3: D4.2 15.113,15.542 15.113,18.057 U1.1
VCC: C1.1 J4.1 S3.2 S3.5 U2.3 U2.4 | length 20.8
  Top Layer w0.5: 23.444,46.296 23.444,43.536 24.892,42.088 U2.4
  Top Layer w0.8: J4.1 15.545,46.355 16.268,45.632 C1.1 19.714,46.296 S3.5 23.444,46.296 S3.2 ; U2.3@26.708,41.021 U2.4@26.708,41.859
VDDA: C9.1 L1.2 U1.9 | length 8.8
  Top Layer w0.3: U1.9 18.659,20.168 C9.1@24.166,20.168
  Top Layer w0.5: C9.1 L1.2@25.845,20.156
VIN: P2.1 S3.3 S3.4 | length 6.8
  Top Layer w1: P2.1@19.01,48.296 S3.4 S3.3
VSSA: C9.2 R1.2 U1.8 | length 9.6
  Top Layer w0.3: U1.8 19.464,18.656 C9.2
  Top Layer w0.5: C9.2 R1.2@25.771,18.656
pads on no net: P1.7 P1.9 U3.2 U3.4 U3.5 U3.14 U3.16 U3.19 U3.21 USB1.0 Y1.3

## Polygon pours and split planes (outlines as drawn)
GND on Bottom Layer "Top Overlay-No Net" (solid, remove dead copper, pour order 2): 0,35.408 0,14.122 14.148,-0.025 35.433,-0.025 49.581,14.122 49.581,35.357 35.433,49.505 35.433,49.555 14.148,49.555
GND on Top Layer "Top Layer-No Net" (solid, remove dead copper, pour order 3): 0,35.408 0,14.122 14.148,-0.025 35.433,-0.025 49.581,14.122 49.581,35.408 35.433,49.555 14.148,49.555

## Keep-outs
Keep-Out Layer:
  the board outline again, w0.3

## Other copper
Top Layer:
  pour cut-out: 12.626,38.697 10.83,36.901 6.182,41.549 7.978,43.345
  pour cut-out: 36.936,38.735 38.732,36.939 43.365,41.572 41.569,43.369
  pour cut-out: 36.939,10.798 41.598,6.139 43.394,7.936 38.735,12.594
  pour cut-out: 6.165,7.958 10.824,12.617 12.62,10.82 7.961,6.161
  pour cut-out: 8.163,25.006 8.163,22.39 12.052,18.501 14.669,18.501 18.558,22.39 18.558,25.006 14.669,28.895 12.052,28.895
Bottom Layer:
  pour cut-out: 38.732,36.939 36.936,38.735 41.594,43.394 43.391,41.598
  pour cut-out: 36.939,10.798 41.598,6.139 43.394,7.935 38.735,12.594
  pour cut-out: 10.824,12.617 12.62,10.82 7.961,6.161 6.165,7.958
  pour cut-out: 12.617,38.706 7.932,43.391 6.136,41.594 10.82,36.91
  pour cut-out: 42.443,32.233 33.553,32.233 31.775,30.455 31.775,19.025 33.553,17.247 42.443,17.247

## Silkscreen, mask and mechanical layers (free items; w line width, h text height)
Mechanical 1:
  lines w0.3: 49.581,49.555 49.581,-0.025 ; -0.025,-0.025 -0.025,49.555 ; -0.025,-0.025 49.581,-0.025 ; -0.025,-0.025 49.555,49.555 -0.025,49.555 ; -0.025,49.555 49.555,-0.025 49.581,-0.025

## Text inside footprints (layer, text, board x,y; h text height)
P1: Top Overlay "2" at 3.556,32.969 h1.27 r270; Top Overlay "1" at 1.016,32.461 h1.27 r270; Top Overlay "9" at 1.016,18.745 h1.27 r270; Top Overlay "10" at 3.556,18.745 h1.27 r270